# Altium PCB ESP32-PicoDK - new - new.PcbDoc
Units mil, origin at the board's own origin, x right, y up, seen from the top; angles counter-clockwise.
Board outline 1979.37 x 2074.17 mil, 2 copper layers (Top1, Bottom2), stack 40.202 mil thick; 38 components, 64 nets, 219 pads, 89 vias.
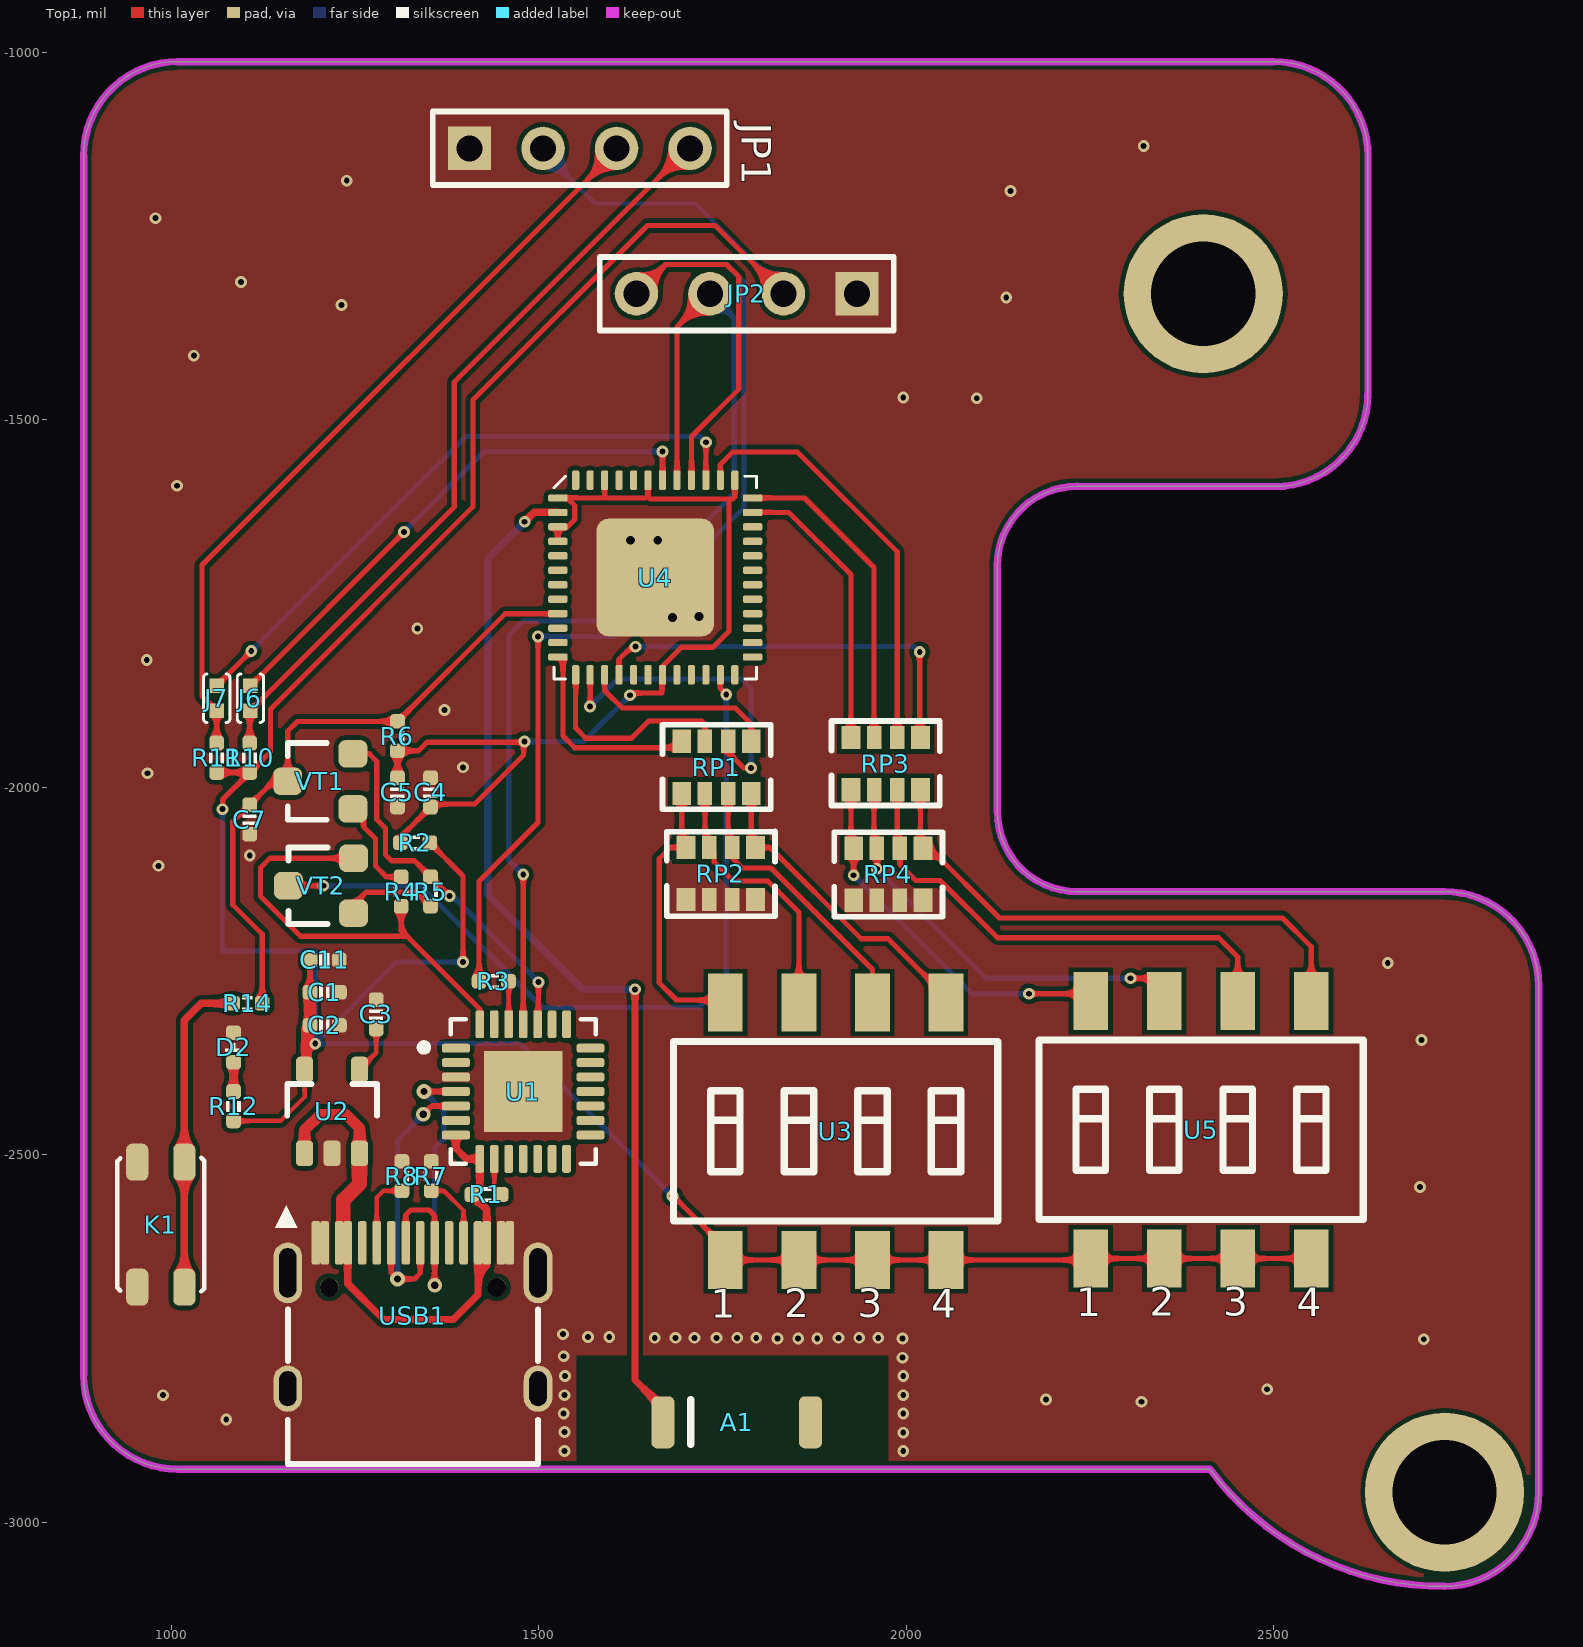
[diagram p0: Top1 view]
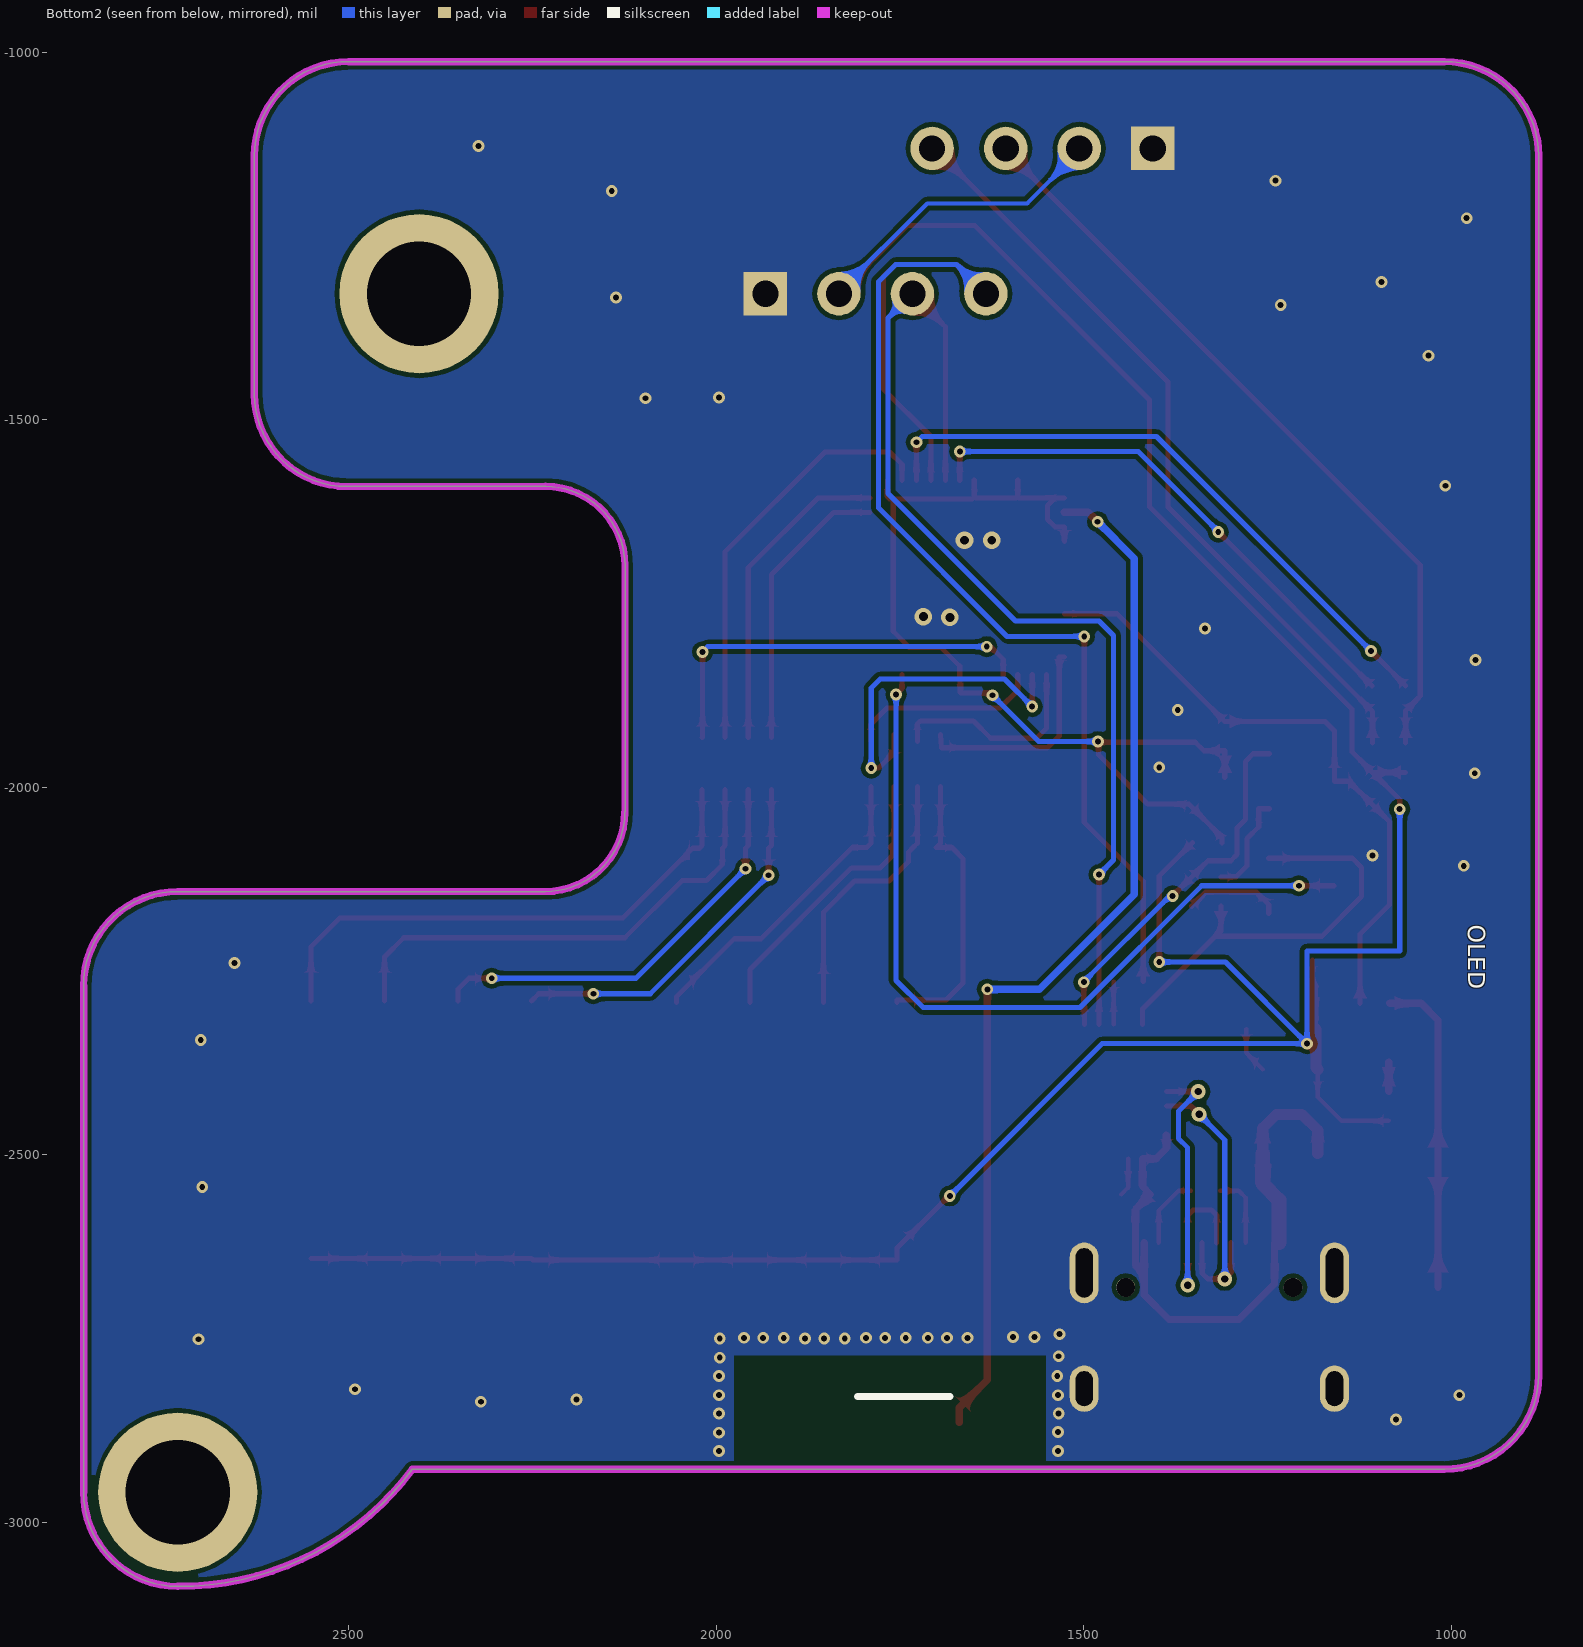
[diagram p1: Bottom2 view, seen from below]
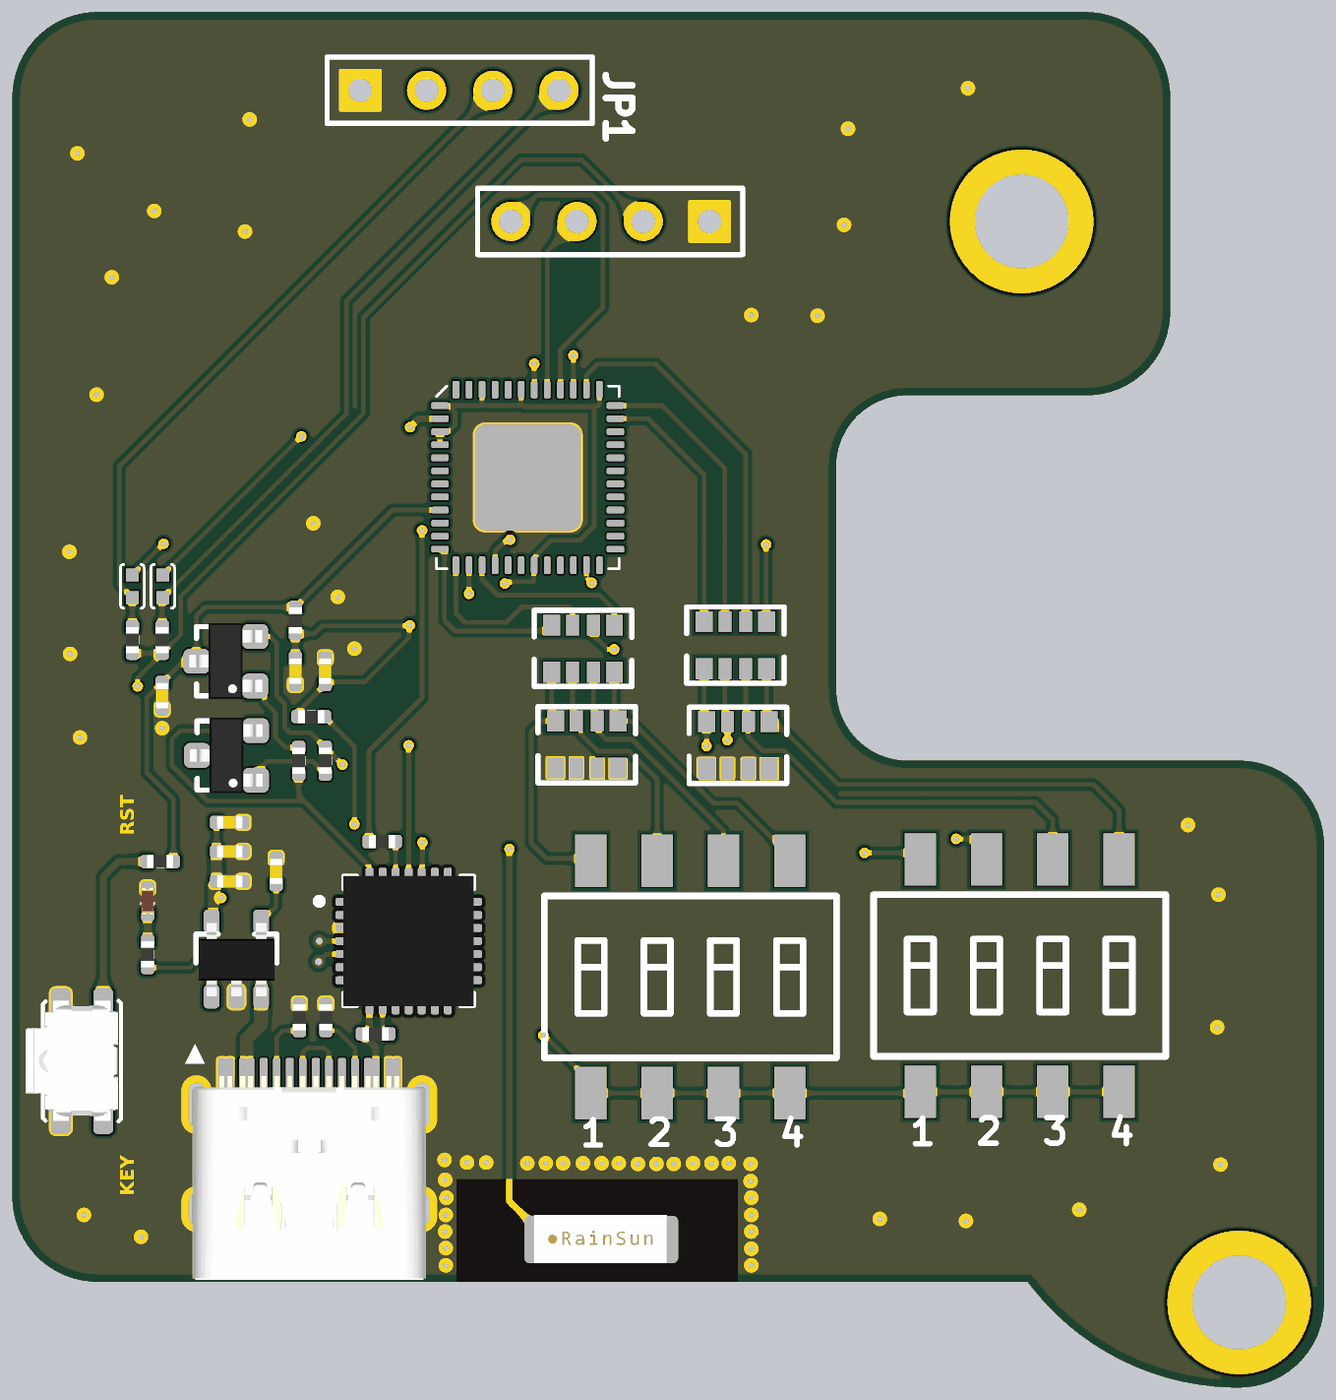
[diagram p2: 3D render of the assembled board from above, using the file's embedded part models]

## Layer stack, top to bottom
Top Solder: solder mask 0.4, Solder Resist, Dk 3.5
Top1: signal copper 1.4
Dielectric 1: core 37.4016, FR-4, Dk 4.2
Bottom2: signal copper 1.4
Bottom Solder: solder mask 0.4, Solder Resist, Dk 3.5

## Board outline
881,-2799.63 ccw(c1009.11,-2799.63) 1009.11,-2927.74 2413.18,-2927.74 ccw(c2730.27,-2692.15) 2732.27,-3087.17 ccw(c2732.26,-2959.06) 2860.37,-2959.06 2860.37,-2270.07 ccw(c2732.26,-2270.07) 2732.26,-2141.96 2232.26,-2141.96 cw(c2232.26,-2033.85) 2124.15,-2033.85 2123.89,-2033.59 2123.89,-1699 cw(c2232,-1699) 2232,-1590.89 2232,-1591 2502.55,-1591 ccw(c2502.55,-1465.55) 2628,-1465.58 2628.11,-1465.55 2628.11,-1141.11 ccw(c2500,-1141.11) 2500,-1013 1009.11,-1013 ccw(c1009.11,-1141.11) 881,-1141.11

## Design rules (kind name [scope] priority, off if disabled: settings)
Clearance [All] p1: gap=6 ignorepadtopadclearanceinfootprint=FALSE
ComponentClearance [All] p1: gap=0 collisioncheckmode=3 verticalgap=0 showdistances=FALSE
DiffPairsRouting [All] p1: maxlimit=9 minlimit=9 mostfreqgap=9 toplayer_minwidth=4 toplayer_maxwidth=4 toplayer_prefwidth=4 bottomlayer_minwidth=4 bottomlayer_maxwidth=4 bottomlayer_prefwidth=4 maxuncoupledlength=500
FanoutControl Fanout_BGA [All] p1: bgadir=Out bgaviamode=Centered fanoutstyle=Auto fanoutdirection=Alternating viagrid=1 // Fanout_BGA (Default Rule)
HoleSize [All] p1: absolutevalues=TRUE maxlimit=10000 minlimit=8 maxpercent=80.000 minpercent=20.000
HoleToHoleClearance [All] p1: gap=0 allowstackedmicrovias=TRUE
MinimumSolderMaskSliver [All] p1 off: minsoldermaskwidth=2
PlaneClearance [All] p1: clearance=8
PlaneConnect [All] p1: planeconnectstyle=Direct reliefexpansion=20 reliefentries=4 reliefconductorwidth=10 reliefairgap=10
PolygonConnect [All] p1: connectstyle=Direct reliefconductorwidth=10 reliefentries=4 polygonreliefangle="90 Angle" airgapwidth=10
RoutingVias [All] p1: holewidth=8 width=16 viastyle="Through Hole" minholewidth=6 minwidth=12 maxholewidth=28 maxwidth=50
SilkToBoardRegionClearance [All] p1 off:
SilkToSilkClearance [All] p1: silktosilkclearance=0
SilkToSolderMaskClearance [IsPad] p1: minsilkscreentomaskgap=0 clearancetoexposedcopper=TRUE
SolderMaskExpansion [All] p1: expansion=3
Width [All] p1: maxlimit=10000 minlimit=6 preferedwidth=7
19 further rules are at their usual default settings.

## Components (designator, comment, footprint, x,y, rotation, side; value= is the part's Value field where it differs from the comment)
A1 "RAINSUN" ANT-Rainsun-AN5120 1769,-2864 r0 top
C1 "0.1uF" CAP_0402 1209,-2279 r180 top value=0.1u
C2 "10uF" CAP_0402 1209,-2324 r180 top value=0.1u
C3 "10nF" CAP_0402 1279,-2309 r270 top value=0.1u
C4 "10uF" CAP_0402 1353,-2007 r270 top value=0.1u
C5 "0.1uF" CAP_0402 1308,-2007 r90 top value=0.1u
C7 "0.1uF" CAP_0402 1107,-2044 r270 top value=0.1u
C11 "10uF" CAP_0402 1208.92,-2235 r180 top value=0.1u
D2 "color?" LED_0402_RED 1085,-2354 r90 top
J6 "跳线" 0402-0R 1108,-1879 r90 top
J7 "跳线" 0402-0R 1062,-1879 r90 top
JP1 "SH_1.0MM_4P" HDR1X4 1406,-1131 r0 top
JP2 "SH_1.0MM_4P" HDR1X4 1933.03,-1328.81 r180 top
K1 "TACT 4P" ButtonTACT_3.5*3.55_90 986,-2595 r90 top value=3.4x3.5
R1 "10K" RES_0402 1429,-2554 r0 top value=22R
R2 "0R" RES_0402 1332,-2075.53 r180 top value=22R
R3 "200R" RES_0402 1439,-2264 r0 top value=22R
R4 "12K" RES_0402 1313,-2142 r90 top value=22R
R5 "12K" RES_0402 1353,-2142 r270 top value=22R
R6 "10K" RES_0402 1308,-1930.5 r90 top value=22R
R7 "5.1K" RES_0402 1354,-2529 r90 top value=22R
R8 "5.1K" RES_0402 1314,-2529 r90 top value=22R
R10 "10K" RES_0402 1107,-1960 r270 top value=22R
R11 "10K" RES_0402 1062,-1960 r270 top value=22R
R12 "1K" RES_0402 1085,-2434 r90 top value=22R
R14 "1K" RES_0402 1104,-2294 r0 top value=22R
RP1 "4D03WGJ0102T5E" RES-ARRAY-SMD_0603-8P-L3.2-W1.6-BL 1742,-1973 r0 top
RP2 "YC164-JR-075K1L" RES-ARRAY-SMD_0603-8P-L3.2-W1.6-BL 1747.76,-2117.57 r180 top
RP3 "4D03WGJ0102T5E" RES-ARRAY-SMD_0603-8P-L3.2-W1.6-BL 1972,-1968 r0 top
RP4 "YC164-JR-075K1L" RES-ARRAY-SMD_0603-8P-L3.2-W1.6-BL 1975.75,-2118.43 r180 top
U1 "CP2102" QFN-28 1479,-2414 r0 top value=Value
U2 "LP2992 3V3" SOT23-5 1219,-2439 r90 top
U3 "DM-04-V" SW-SMD_8P-L11.1-W6.2-P2.54-LS9.8 1904,-2468 r0 top
U4 "ESP32_SIP" QFN-48_7X7 1658.61,-1714.79 r0 top
U5 "DM-04-V" SW-SMD_8P-L11.1-W6.2-P2.54-LS9.8 2401,-2466 r0 top
USB1 "Type-C" Type-C-TOP 1329,-2719 r270 top locked
VT1 "S8050" SMT_TRIODE_NPN 1203,-1992 r90 top
VT2 "S8050" SMT_TRIODE_NPN 1204,-2134.06 r90 top

## Footprints (in the part's own frame and the unit in brackets; to place one, negate y for a bottom-side part, rotate by r counter-clockwise, add the part's x,y. Pads: shape width x height; smd on the part's side, far side on the other; paste and mask are expansions set on the pad)
0402-0R [mm] "选择焊盘"
  rect 0.5x0.5 smd: 1(-0.432,0) 2(0.432,0)
  silkscreen extent -0.84,-0.46 0.84,0.46
ANT-Rainsun-AN5120 [mm] "选择焊盘"
  rrect50% 0.8x1.8 smd: 1(-2.54,0) ""(2.563,0)
  silkscreen extent -1.57,-0.76 -1.57,0.79, body extent -2.57,-0.91 2.54,0.94, height 1.32
ButtonTACT_3.5*3.55_90 [mil]
  rrect50% 50x30 smd: 1(-85,32) 2(-85,-32) 3(85,32) 4(85,-32)
  silkscreen extent -91,-59 91,59, body extent -90,-55 91,85, height 56
CAP_0402 [mil]
  rrect50% 20x20 smd: 1(-20,0) 2(20,0)
  silkscreen extent -7,-9 7,9, body extent -20,-10 20,10, height 20
HDR1X4 [mm] "Connector; Header; 4 Position"
  rect 1.5x1.5 hole 0.9: 1(0,0)
  round 1.5 hole 0.9: 2(2.54,0) 3(5.08,0) 4(7.62,0)
  silkscreen extent -1.27,-1.27 8.89,1.27
LED_0402_RED [mil]
  rrect50% 20x20 smd: 1(-20,0) 2(20,0)
  silkscreen extent -6,-11 6,10, body extent -20,-10 20,10, height 18
QFN-28 [mil]
  rrect50% 38x12 smd mask+5: 1(-91.5,59.06) 2(-91.5,39.37) 3(-91.5,19.69) 4(-91.5,0) 5(-91.5,-19.68) 6(-91.5,-39.37) 7(-91.5,-59.05) 15(91.5,-59.05) 16(91.5,-39.37) 17(91.5,-19.68) 18(91.5,0) 19(91.5,19.69) 20(91.5,39.37) 21(91.5,59.06)
  rrect50% 12x38 smd mask+5: 8(-59.06,-91.5) 9(-39.37,-91.5) 10(-19.69,-91.5) 11(0,-91.5) 12(19.68,-91.5) 13(39.37,-91.5) 14(59.05,-91.5) 22(59.05,91.5) 23(39.37,91.5) 24(19.68,91.5) 25(0,91.5) 26(-19.69,91.5) 27(-39.37,91.5) 28(-59.06,91.5)
  rect 106.3x110.24 smd: 29(0,0)
  silkscreen extent -140,-98 99,99, body extent -98,-98 98,98, height 35
QFN-48_7X7 [mm]
  rrect50% 0.675x0.25 smd: 1(-3.362,2.75) 2(-3.362,2.25) 3(-3.362,1.75) 4(-3.362,1.25) 5(-3.362,0.75) 6(-3.362,0.25) 7(-3.362,-0.25) 8(-3.362,-0.75) 9(-3.362,-1.25) 10(-3.362,-1.75) 11(-3.362,-2.25) 12(-3.362,-2.75) 25(3.363,-2.75) 26(3.363,-2.25) 27(3.363,-1.75) 28(3.363,-1.25) 29(3.363,-0.75) 30(3.363,-0.25) 31(3.363,0.25) 32(3.363,0.75) 33(3.363,1.25) 34(3.363,1.75) 35(3.363,2.25) 36(3.363,2.75)
  rrect50% 0.25x0.675 smd: 13(-2.75,-3.362) 14(-2.25,-3.362) 15(-1.75,-3.362) 16(-1.25,-3.362) 17(-0.75,-3.362) 18(-0.25,-3.362) 19(0.25,-3.362) 20(0.75,-3.362) 21(1.25,-3.362) 22(1.75,-3.362) 23(2.25,-3.362) 24(2.75,-3.362) 37(2.75,3.363) 38(2.25,3.363) 39(1.75,3.363) 40(1.25,3.363) 41(0.75,3.363) 42(0.25,3.363) 43(-0.25,3.363) 44(-0.75,3.363) 45(-1.25,3.363) 46(-1.75,3.363) 47(-2.25,3.363) 48(-2.75,3.363)
  rrect20% 4.064x4.064 smd: 49(0,0)
  silkscreen extent -3.5,-3.5 3.5,3.5, body extent -3.5,-3.5 3.5,3.5, height 1
RES-ARRAY-SMD_0603-8P-L3.2-W1.6-BL [mm]
  rect 0.65x0.8 smd paste+0 mask+0.051: 1(-1.2,-0.9) 4(1.2,-0.9) 5(1.2,0.9) 8(-1.2,0.9)
  rect 0.5x0.8 smd paste+0 mask+0.051: 2(-0.4,-0.9) 3(0.4,-0.9) 6(0.4,0.9) 7(-0.4,0.9)
  silkscreen extent -1.87,-1.45 1.87,1.47
RES_0402 [mil]
  rrect50% 20x20 smd: 1(-20,0) 2(20,0)
  silkscreen extent -6,-10 7,10, body extent -20,-10 20,10, height 14
SMT_TRIODE_NPN [mm] "Surface mount NPN transistor, package SOT-23"
  rrect50% 0.95x1 smd: 1(-0.95,-1.125) 2(0.95,-1.125) 3(0,1.125)
  silkscreen extent -1.33,-0.23 1.33,1.12, body extent -1.45,-1.4 1.45,1.4, height 1.3
SOT23-5 [mm] "SOT23, 3-Leads, Body 3.1x3.0mm (max), Pitch 0.95mm, IPC Medium Density"
  rrect50% 0.889x0.6 smd: 1(-1.5,0.95) 2(-1.5,0) 3(-1.5,-0.95) 4(1.396,-0.95) 5(1.396,0.95)
  silkscreen extent -0.2,-1.55 0.9,1.55, body extent -1.48,-1.45 1.32,1.45, height 1.2
SW-SMD_8P-L11.1-W6.2-P2.54-LS9.8 [mm]
  rect 1.2x2 smd paste+0 mask+0.051: 1(-3.81,-4.45) 2(-1.27,-4.45) 3(1.27,-4.45) 4(3.81,-4.45) 5(3.81,4.45) 6(1.27,4.45) 7(-1.27,4.45) 8(-3.81,4.45)
  silkscreen extent -5.6,-3.1 5.6,3.1
Type-C-TOP [mm]
  round 0.65 hole 0.65: 0(-0.98,2.89) 0(-0.98,-2.89)
  oval 1.6x1 hole 0.6 slot 1.2 at 0 deg: 1(2.52,4.325) 2(2.52,-4.325)
  oval 2.1x1 hole 0.6 slot 1.7 at 0 deg: 3(-1.48,-4.325) 4(-1.48,4.325)
  rrect50% 1.5x0.3 smd: A1(-2.52,-3.35) A4(-2.52,-2.55) A5(-2.52,-1.25) A6(-2.52,-0.25) A7(-2.52,0.25) A8(-2.52,1.25) A9(-2.52,2.55) A12(-2.52,3.35) B1(-2.52,3.05) B4(-2.52,2.25) B5(-2.52,1.75) B6(-2.52,0.75) B7(-2.52,-0.75) B8(-2.52,-1.75) B9(-2.52,-2.25) B12(-2.52,-3.05)
  silkscreen extent -0.22,-4.32 5.12,4.32, body extent -2.57,-4.48 5.18,4.48, height 3.26

## Part data
A1: library part ANT-Rainsun-AP5120
C1 C2 C3 C4 C5 C7 C11: library part 电容-0402, "Capacitor"
D2: library part LED_0402, "LED", Type=0402
J6 J7: "Resistor", LatestRevisionDate=17-Jul-2002, LatestRevisionNote="Re-released for DXP Platform.", PackageDescription="Axial Device, Thru-Hole; 2 Leads; 0.4 in Pin Spacing", PackageReference=AXIAL-0.4, Published=8-Jun-2000, Publisher="Altium Limited"
K1: library part ButtonTACT, "Button", Type="TACT 4P"
R1 R2 R3 R4 R5 R6 R7 R8 R10 R11 R12 R14: library part 电阻-0402, "Resistor"
RP1 RP2 RP3 RP4: library part RP
U1: "USBתTTL", MFG #1="SILICON LABS", PART DESC="SINGLE-CHIP USB TO UART BRIDGE, QFN28, RoHS.", PART NUMBER=CP2102, RefDes=RefDes, Type=DEV
U2: library part LP2992, "LDO"
U3 U5: library part "SW DIP-4", "DIP Switch, 4 Position, SPST", Code_IPC=SOIC127P600-8, Code_JEDEC=MS-012-AA, LatestRevisionDate=29-May-2009, LatestRevisionNote="IPC-7351 Footprint Added.", PackageDescription="8-Pin Small Outline Integrated Circuit 1.27 mm Pitch", PackageReference=SO8, PackageVersion=Dec-2002, Published=24-Mar-1999, Publisher="Altium Limited"
U4: library part ESP32-PICO
USB1: library part USB-Type-C-TOP
VT1 VT2: library part SMT_TRIODE_NPN, "Surface mount NPN transistor, package SOT-23"
JP1 JP2: LatestRevisionDate=17-Jul-2002, LatestRevisionNote="Re-released for DXP Platform.", Publisher="Altium Limited"

## Free pads (board coordinates)
  round 216.54 hole 141.73 mask+4: 6(2404.04,-1328.81) 6(2732.26,-2959.06)

## Via types
v1: diameter 16, hole 8, Top1 to Bottom2, 81 vias
v2: diameter 24, hole 12, Top1 to Bottom2, 4 vias
v3: diameter 20, hole 10, Top1 to Bottom2, tented both sides, 4 vias

## Nets (pads, with @x,y where several pads share a name; then routed paths per layer and width w, separated by ;. In a path a pad name is that pad's centre, name@x,y a point inside that pad or via, vN(x,y) a via of type N, cw(c..) or ccw(c..) an arc to the next point about the centre after c; other vN are vias at no path point)
3V3A: C4.2 C5.2 R2.2 R6.1 U4.1 U4.3 U4.4 U4.19 U4.37 U4.43 U4.46 | length 1385.8
  Top1 w7: C5.2 R6.1@1308,-1953.01 ; R6.1 1336.5,-1950.5 1348.11,-1938.89 v1@1479.62,-1938.89 ; R2.2 1312,-2068 C4.2 1357,-2023 1413,-2023 1479.62,-1956.38 v1@1479.62,-1938.89 ; v1(1480.63,-1937.88) v1@1479.62,-1938.89 ; U4.4 U4.3 1539.11,-1645.89 1549.02,-1635.98 1549.02,-1617.01 U4.1@1538.53,-1606.52 ; U4.1 U4.1@1538.53,-1606.52 ; U4.46 1589.72,-1603.97 ; v1(1624.13,-1874.88) 1627.13,-1871.88 1667.46,-1871.88 U4.19 1668.46,-1835.54 1694.31,-1809.69 1737.31,-1809.69 1759,-1788 1759,-1608.88 1758,-1607.88 ; U4.43 1648.77,-1603.88 ; U4.37 1766.88,-1604.88 1763.88,-1607.88 1758,-1607.88 ; U4.1@1538.53,-1606.52 1588.13,-1606.52 1589.72,-1604.93 1589.72,-1603.97 ; 1589.72,-1603.97 1592.27,-1606.52 1646.13,-1606.52 1648.77,-1603.88 ; 1648.77,-1603.88 1648.77,-1604.88 1651.77,-1607.88 1758,-1607.88
  Bottom2 w7: v1(1480.63,-1937.88) 1561.13,-1937.88 v1(1624.13,-1874.88)
CP_Rx: JP2.3 U1.25 U4.41 | length 1481.3
  Top1 w7: U1.25 v1(1479,-2118.88) ; U4.41 1688.14,-1373.69 JP2.3
  Bottom2 w7: v1(1479,-2118.88) 1459.31,-2099.19 1459.31,-1793.68 1479.12,-1773.88 1592.59,-1773.88 1766.13,-1600.35 1766.13,-1361.91 JP2.3
CP_Tx: JP2.4 R3.1 U4.40 | length 1800.8
  Top1 w7: R3.1 1419,-2128.01 1499.13,-2047.88 v1(1499.13,-1794.88) ; JP2.4 1672.96,-1288.88 1755.63,-1288.88 1772.13,-1305.38 1772.13,-1458.58 1707.83,-1522.88 U4.40
  Bottom2 w7: v1(1499.13,-1794.88) 1604.13,-1794.88 1779.13,-1619.88 1779.13,-1312.38 1755.63,-1288.88 1672.96,-1288.88 JP2.4
DTR: R4.1 U1.28 VT2.2 | length 607.4
  Top1 w7: VT2.2 1134.38,-2096.66 1121.88,-2109.16 1121.88,-2148.87 1175.88,-2202.87 1320,-2202.87 1313,-2195.87 1313,-2194.93 ; R4.1 1313,-2194.93 ; U1.28 1419.94,-2301.87 1313,-2194.93
EN: C7.1 R6.2 R14.2 U4.9 VT1.3 | length 863.2
  Top1 w7: R14.2 1124,-2199.99 1083.88,-2159.87 1083.88,-2047.12 C7.1 1139,-1992 VT1.3 1158.71,-1923.67 1171.88,-1910.5 R6.2 1454.5,-1764 U4.9
FLASH_CLK: U4.31
FLASH_CS: U4.25
FLASH_SD0: U4.27
FLASH_SD1: U4.33
FLASH_SD2: U4.30
FLASH_SD3: U4.32
GND: C1.1 C2.1 C3.1 C4.1 C5.1 C7.2 C11.1 D2.2 JP1.1 JP2.1 K1.1 K1.3 R7.2 R8.2 RP2.5 RP2.6 RP2.7 RP2.8 RP4.5 RP4.6 RP4.7 RP4.8 U1.3 U1.29 U2.2 U4.49 USB1.1 USB1.2 USB1.3 USB1.4 USB1.A1 USB1.A12 USB1.B1 USB1.B12
  other v1: 1535,-2903 1996,-2903 1996,-2878 1535,-2877 1075,-2860 1534,-2852 1996,-2852 2320,-2836 2190,-2833 989,-2827 1535,-2827 1996,-2827 2491,-2819 1536,-2801 1996,-2801 1995,-2776 1534,-2774 2704,-2751 1825,-2750 1853,-2750 1879,-2750 1995,-2750 1658,-2749 1686,-2749 1712,-2749 1742,-2749 1770,-2749 1796,-2749 1908,-2749 1936,-2749 1962,-2749 1567,-2748 1596,-2748 1533,-2744 2699,-2544 2701,-2344 2655,-2239 983,-2107 1107,-2093 968,-1981 1397.13,-1973 1372,-1895 967,-1827 1335,-1784 1008,-1590 2096,-1471 1996,-1470 1031,-1413 1232,-1344 2136,-1334 1095,-1313 979,-1226 2142,-1189 1239,-1175 2323,-1128
  other v2: 1682,-1769 1718,-1768 1625,-1664 1662,-1664
GPIO0: U4.23 VT2.3 | length 1098.4
  Top1 w7: VT2.3 v1(1207.13,-2134.06) ; U4.23 1747.2,-1865.95 v1(1755.13,-1873.88)
  Bottom2 w7: v1(1207.13,-2134.06) 1339.31,-2134.06 1505.13,-2299.88 1718.12,-2299.88 1755.13,-2262.87 v1(1755.13,-1873.88)
GPIO2: U4.22
GPIO4: U4.24
GPIO5: U4.34
GPIO9: U4.28
GPIO10: U4.29
GPIO12: U4.18
GPIO13: U4.20
GPIO14: U4.17
GPIO15: U4.21
GPIO18: RP3.8 U4.35 | length 390.6
  Top1 w7: U4.35 1840.2,-1626.2 1924.76,-1710.76 RP3.8
GPIO19: RP3.6 U4.38 | length 578.3
  Top1 w7: U4.38 1747.2,-1560.81 1764.13,-1543.88 1851.88,-1543.88 1987.75,-1679.75 RP3.6
GPIO21: J6.2 U4.42 | length 733.5
  Top1 w7: J6.2 v1(1317,-1653) ; U4.42 v1(1668.46,-1543.38)
  Bottom2 w7: v1(1317,-1653) 1316,-1653 1316.5,-1652.5 1425.62,-1543.38 v1(1668.46,-1543.38)
GPIO22: J7.2 U4.39 | length 860.7
  Top1 w7: J7.2 v1(1109.13,-1814.88) ; U4.39 v1(1727.51,-1530.88)
  Bottom2 w7: v1(1109.13,-1814.88) 1401.01,-1523 1719.63,-1523 v1(1727.51,-1530.88)
GPIO23: RP3.7 U4.36 | length 435.8
  Top1 w7: U4.36 1861.52,-1606.52 1956.25,-1701.25 RP3.7
GPIO25: RP1.6 U4.14 | length 455.9
  Top1 w7: v1(1570.03,-1890.34) U4.14 ; RP1.6@1757.75,-1928.57 RP1.6 1757.75,-1952.88 1778.87,-1974 v1(1789,-1974)
  Bottom2 w7: v1(1570.03,-1890.34) 1607.49,-1852.88 1776.63,-1852.88 1789.13,-1865.38 1789,-1865.51 v1(1789,-1974)
GPIO26: RP1.5 U4.15 | length 263.1
  Top1 w7: U4.15 1589.72,-1868.47 1613.63,-1892.38 1767.38,-1892.38 1789.24,-1914.24 1789.24,-1928.57 RP1.5
GPIO27: RP3.5 U4.16 | length 557
  Top1 w7: U4.16 1609.4,-1826.1 1626.63,-1808.88 v1(1631.88,-1808.88) ; v1(2018.36,-1816) 2018.36,-1931.68 RP3.5
  Bottom2 w7: v1(1631.88,-1808.88) 2011.24,-1808.88 v1(2018.36,-1816)
GPIO32: RP1.8 U4.12 | length 298.9
  Top1 w7: U4.12 1533.13,-1823.05 1533.13,-1930.38 1549.13,-1946.38 1693.26,-1946.38 1694.01,-1937.5 RP1.8@1694.76,-1928.57
GPIO33: RP1.7 U4.13 | length 288.8
  Top1 w7: U4.13 1550.35,-1919.6 1564.13,-1933.38 1626.49,-1933.38 1649.87,-1910 1722,-1910 1726.25,-1914.25 1726.25,-1928.57 RP1.7
GPIO34: U4.10
GPIO35: U4.11
GPIO37: U4.6
GPIO38: U4.7
NetA1_1: A1.1 U4.2 | length 1436.4
  Top1 w10: v1(1481,-1639) 1493.8,-1626.2 U4.2 ; v1(1631,-2275) 1631,-2806.31 1669,-2844.31 A1.1
  Bottom2 w10: v1(1481,-1639) 1431,-1689 1431,-2146 1560,-2275 v1(1631,-2275)
NetC3_2: C3.2 U2.4 | length 64.4
  Top1 w6: U2.4 1279,-2361.46 C3.2
NetD1_1: 
NetD2_1: D2.1 R12.2 | length 40
  Top1 w10: R12.2 D2.1
NetK1_2: K1.2 K1.4 R14.1 | length 438.5
  Top1 w10: K1.2 K1.4 1018,-2317 1041,-2294 R14.1
NetR1_2: R1.2 U1.9 | length 52.4
  Top1 w6: U1.9 1439.63,-2544.63 R1.2
NetR3_2: R3.2 U1.26 | length 58.2
  Top1 w6: U1.26 R3.2@1459.31,-2264.31
NetR4_2: R4.2 VT1.1 | length 140.1
  Top1 w7: VT1.1 1261.88,-2029.4 1261.88,-2053.87 1277.88,-2069.87 1277.88,-2106.87 1293.01,-2122 R4.2
NetR5_2: R5.2 VT2.1 | length 131.7
  Top1 w7: VT2.1 1248.29,-2159.62 1265.04,-2142.87 1301.62,-2142.87 1301.99,-2142.5 1324.01,-2142.5 1324.38,-2142.87 1333.87,-2142.87 R5.2
NetR7_1: R7.1 USB1.B5 | length 98.9
  Top1 w6: R7.1 1371,-2549 1397.9,-2575.9 USB1.B5
NetR8_1: R8.1 USB1.A5 | length 99.6
  Top1 w6: USB1.A5 1279.79,-2558.21 1289,-2549 R8.1
NetRP1_1: RP1.1 RP2.4 U3.8 | length 399.7
  Top1 w7: RP1.1@1694.76,-1999.44 RP1.1 1694.76,-2076.37 RP2.4 1679.13,-2082.13 1664,-2097.26 1664,-2266.25 1687.39,-2289.64 1754,-2289.64 U3.8
NetRP1_2: RP1.2 RP2.3 U3.7 | length 373.8
  Top1 w7: RP1.2@1726.25,-1999.44 RP1.2 1726.25,-2076.37 RP2.3 1738.35,-2088.47 1738.35,-2101.35 1764.75,-2127.75 1811.73,-2127.75 1854,-2170.02 U3.7
NetRP1_3: RP1.3 RP2.2 U3.6 | length 402.5
  Top1 w7: RP1.3@1757.75,-1999.44 RP1.3 1757.75,-2076.37 RP2.2@1760,-2078.62 ; RP2.2 RP2.2@1760,-2078.62 ; U3.6 1954,-2248 1816,-2110 1777,-2110 1760,-2093 RP2.2@1760,-2078.62
NetRP1_4: RP1.4 RP2.1 U3.5 | length 435.9
  Top1 w7: RP1.4@1789.24,-1999.44 RP1.4 1789.24,-2076.37 RP2.1 1814.79,-2082.13 1938.84,-2206.17 1975.17,-2206.17 2054,-2285 U3.5
NetRP3_1: RP3.1 RP4.4 U5.8 | length 511.3
  Top1 w7: RP3.1 1924.76,-2079.25 RP4.4 v1(1928.51,-2119.88) ; v1(2167,-2281) 2241.19,-2281 U5.8
  Bottom2 w7: v1(1928.51,-2119.88) 2089.63,-2281 v1(2167,-2281)
NetRP3_2: RP3.2 RP4.3 U5.7 | length 583.9
  Top1 w7: RP3.2 1956.25,-2079.25 RP4.3 v1(1960,-2110.88) ; v1(2305.13,-2259.88) 2336,-2259.88 2351,-2274.88 U5.7
  Bottom2 w7: v1(1960,-2110.88) 2109,-2259.88 v1(2305.13,-2259.88)
NetRP3_3: RP3.3 RP4.2 U5.6 | length 674.8
  Top1 w7: RP3.3 1987.75,-2079.25 RP4.2 1991.5,-2105.38 2013,-2126.88 2046.13,-2126.88 2124.13,-2204.88 2424.88,-2204.88 2451,-2231 U5.6
NetRP3_4: RP3.4 RP4.1 U5.5 | length 738.4
  Top1 w7: RP3.4 2019.24,-2079.25 RP4.1 2032,-2083 2126.88,-2177.88 2511.88,-2177.88 2551,-2217 U5.5
OLED_SCL: J7.1 JP1.3 R11.1 | length 1053.5
  Top1 w7: R11.1 J7.1 1042.13,-1876.13 1042.13,-1697.87 1607.5,-1132.5 JP1.3@1610,-1130
OLED_SDA: J6.1 JP1.4 R10.1 | length 1058.9
  Top1 w7: R10.1 1107,-1897 J6.1 1385.13,-1618.87 1385.13,-1448.87 1658.12,-1175.88 1703,-1131 JP1.4
RTS: R5.1 U1.24 VT1.2 | length 506.1
  Top1 w7: VT1.2 1269.6,-1954.6 1279.88,-1964.88 1279.88,-2043.87 1291.47,-2055.46 1291.47,-2091.47 1300,-2100 1331,-2100 R5.1 v1(1378.91,-2147.91) ; U1.24 1499.8,-2286.2 v1(1499.8,-2265.2)
  Bottom2 w7: v1(1378.91,-2147.91) 1382.91,-2147.91 1499.8,-2264.8 v1(1499.8,-2265.2)
SENSOR_VN: U4.8
SENSOR_VP: U4.5
USB-PWR-DM: U1.5 USB1.A7 USB1.B7 | length 415.9
  Top1 w7: USB1.B7 1299.47,-2660.47 v3(1308,-2669) 1331,-2669 1338.84,-2661.16 USB1.A7 ; v3(1343,-2445) 1354.31,-2433.68 U1.5
  Bottom2 w7: v3(1308,-2669) 1308,-2480 v3(1343,-2445)
USB-PWR-DP: U1.4 USB1.A6 USB1.B6 | length 501.5
  Top1 w7: USB1.A6 1319.16,-2581.84 1326,-2575 1351,-2575 1358.53,-2582.53 USB1.B6 v3(1358.53,-2677.47) ; v3(1344,-2414) U1.4
  Bottom2 w7: v3(1344,-2414) 1370.91,-2440.91 1370.91,-2478.09 1358.53,-2490.47 v3(1358.53,-2677.47)
VBUS: R1.1 U1.7 U1.8 U2.1 U2.3 USB1.A4 USB1.A9 USB1.B4 USB1.B9 | length 868.8
  Top1 w7: USB1.A4 1234.42,-2619.79 USB1.B9
  Top1 w10: USB1.B9 1240.42,-2675.42 1289,-2724 1384,-2724 1417.58,-2690.42 1417.58,-2662 ; U1.7 1387.5,-2491.5 1401.5,-2505.5 U1.8 1419.94,-2543.05 R1.1 1429.39,-2574.39 USB1.A9 1429.39,-2650.19 1417.58,-2662 ; USB1.B4 1417.58,-2662
  Top1 w15: U2.1 1181.6,-2466.4 1203,-2445 1238,-2445 1256.4,-2463.4 U2.3
  Top1 w20: USB1.A4@1234.42,-2619.79 1234.42,-2561.58 1256.4,-2539.6 U2.3
VCC_3V3: C1.2 C2.2 C11.2 JP1.2 JP2.2 R2.1 R10.2 R11.2 R12.1 U2.5 U3.1 U3.2 U3.3 U3.4 U5.1 U5.2 U5.3 U5.4 | length 4511.5
  Top1 w6: R12.1 1149,-2454 1181.6,-2421.4 U2.5
  Top1 w7: R11.2 R10.2 ; v1(1070.13,-2029.88) 1070.13,-2016.87 R10.2 ; U2.5 1181.6,-2363.41 1184,-2361.01 v1(1196.13,-2348.88) 1188.92,-2341.67 1188.92,-2324.08 1188.92,-2254.87 ; C11.2 1188.92,-2254.87 ; C1.2@1189,-2274 1189,-2254.95 1188.92,-2254.87 ; R2.1 1397.13,-2120.66 v1(1397.13,-2237.88) ; v1(1682,-2556) 1683.12,-2556 1754,-2626.88 U3.1 U3.2 U3.3 U3.4 2249,-2643.19 U5.1 U5.2 U5.3 U5.4 ; JP2.2 1740.1,-1235.88 1648.13,-1235.88 1410.5,-1473.51 1410.5,-1618.51 1135.13,-1893.88 1135.13,-1951.87 R10.2
  Top1 w15: U2.5 1184,-2381.65 1184,-2361.01 1184,-2329 1188.92,-2324.08 C2.2 C1.2 C1.2@1189,-2274
  Bottom2 w6: JP1.2@1504,-1133 1577,-1206 1712.92,-1206 1833.03,-1326.1 JP2.2
  Bottom2 w7: v1(1070.13,-2029.88) 1070.13,-2222.88 1196.13,-2222.88 v1(1196.13,-2348.88) ; v1(1397.13,-2237.88) 1307.13,-2237.88 v1(1196.13,-2348.88) ; v1(1682,-2556) 1474.88,-2348.88 v1(1196.13,-2348.88)
pads on no net: A1. U1.1 U1.2 U1.6 U1.10 U1.11 U1.12 U1.13 U1.14 U1.15 U1.16 U1.17 U1.18 U1.19 U1.20 U1.21 U1.22 U1.23 U1.27 U4.26 U4.44 U4.45 U4.47 U4.48 USB1.0 USB1.A8 USB1.B8

## Polygon pours and split planes (outlines as drawn)
GND on Bottom2 "GND_L02_P001" (solid, remove dead copper, pour order 1): 869,-938 869,-3162.98 2989,-3163.02 2989,-938
GND on Top1 "GND_L01_P000" (solid, remove dead copper, pour order 0): 855,-942 855,-3163 2946.08,-3163 2975,-942

## Keep-outs
Keep-Out Layer:
  lines w10: 2123.89,-2033.59 2123.89,-1699 cw(c2232,-1699) 2232,-1590.89 ; 2124.15,-2033.85 ccw(c2232.26,-2033.85) 2232.26,-2141.96 2732.26,-2141.96 cw(c2732.26,-2270.07) 2860.37,-2270.07 2860.37,-2959.06 cw(c2732.26,-2959.06) 2732.27,-3087.17 cw(c2730.27,-2692.15) 2413.18,-2927.74 1009.11,-2927.74 cw(c1009.11,-2799.63) 881,-2799.63 881,-1141.11 cw(c1009.11,-1141.11) 1009.11,-1013 2500,-1013 cw(c2500,-1141.11) 2628.11,-1141.11 2628.11,-1465.55 ; 2232,-1591 2502.55,-1591 ccw(c2502.55,-1465.55) 2628,-1465.58

## Other copper
Top1:
  pour cut-out: 1976,-2773 1551,-2773 1551,-2998 1976,-2998
Bottom2:
  pour cut-out: 1976,-2773 1551,-2773 1551,-2998 1976,-2998

## Silkscreen, mask and mechanical layers (free items; w line width, h text height)
Top Overlay:
  region: 1171.5,-2599 1141.5,-2599 1156.5,-2569
Bottom Overlay:
  lines w10: 1682.16,-2828.84 1807.16,-2828.84
  text "OLED" at 985,-2187 h40 r90
Top Solder:
  region: 1551,-2773 1551,-2998 1976,-2998 1976,-2773
  text "RST" at 1092.01,-2262.35 h40 r90
  text "KEY" at 1092.01,-2805.82 h40 r90
Bottom Solder:
  region: 1551,-2773 1551,-2998 1976,-2998 1976,-2773

## Text inside footprints (layer, text, board x,y; h text height)
U3: Top Overlay "1" at 1734,-2721.92 h38.61; Top Overlay "2" at 1834,-2721.12 h38.61; Top Overlay "3" at 1934,-2721.12 h38.61; Top Overlay "4" at 2034,-2721.92 h38.61
U5: Top Overlay "1" at 2231,-2719.92 h38.61; Top Overlay "2" at 2331,-2719.12 h38.61; Top Overlay "3" at 2431,-2719.12 h38.61; Top Overlay "4" at 2531,-2719.92 h38.61